# EAGLE board Pcb (EAGLE 9.7.0)
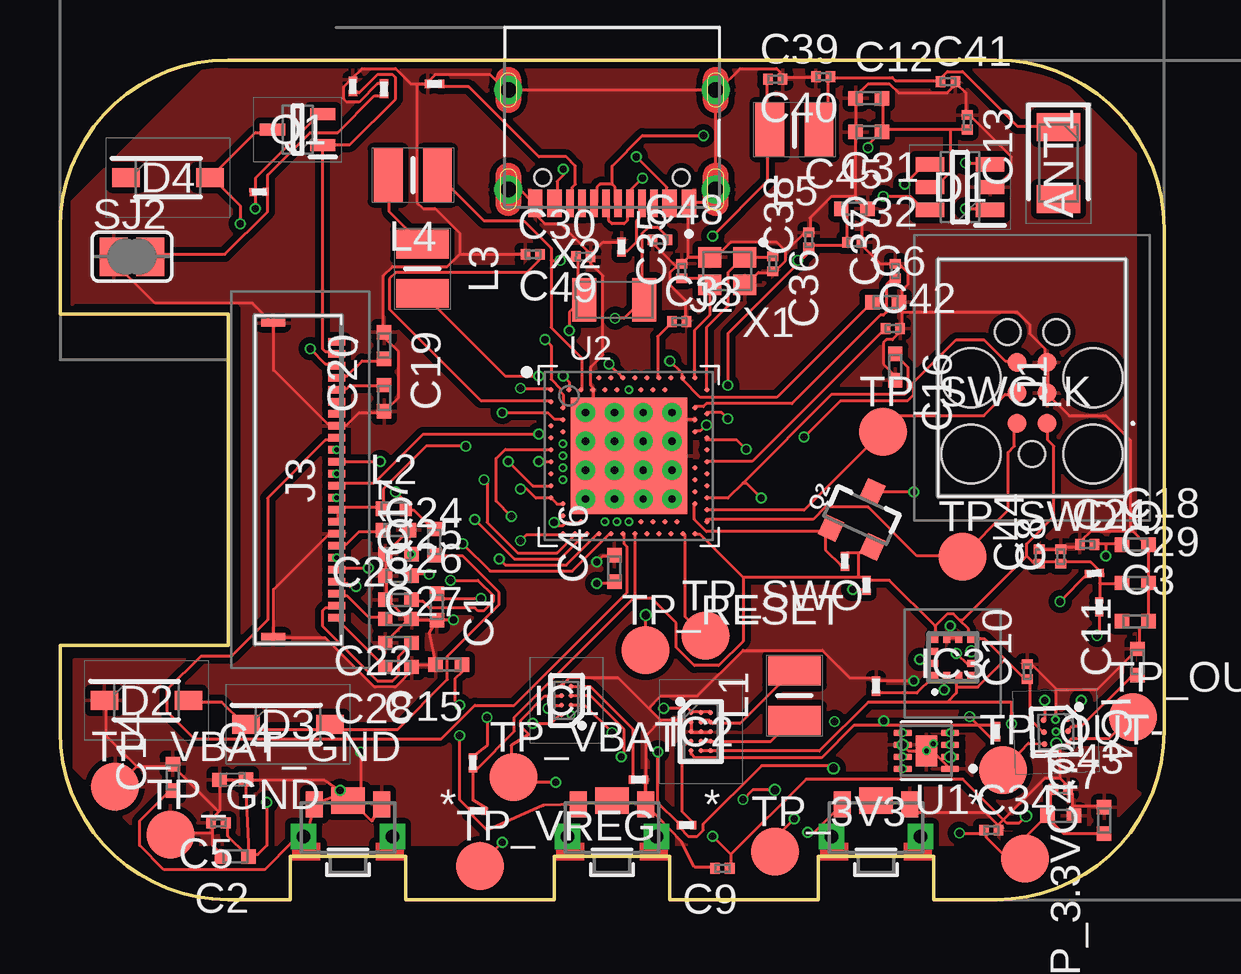
[diagram p0: board, top side]
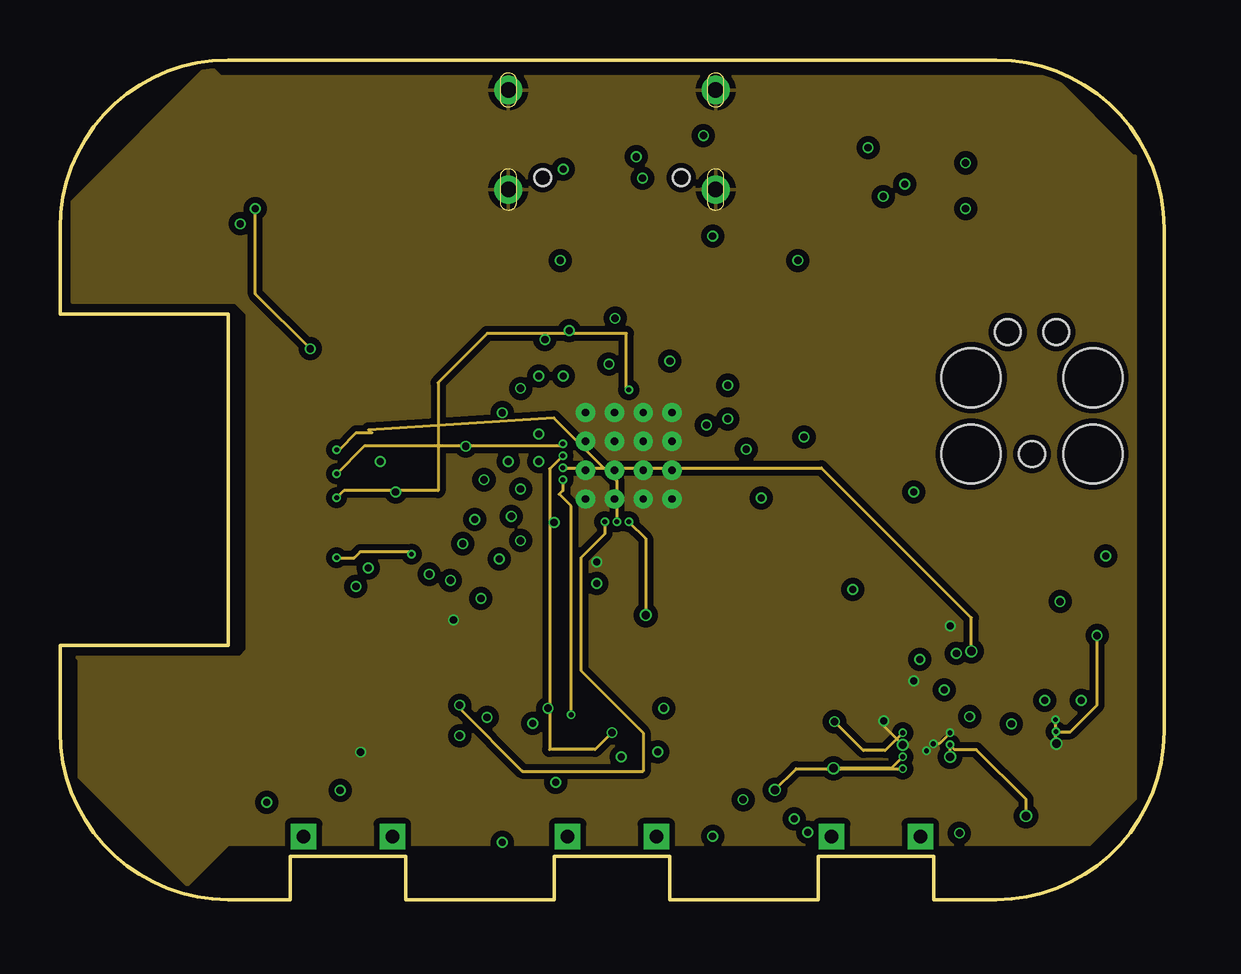
[diagram p1: board, inner layer GND]
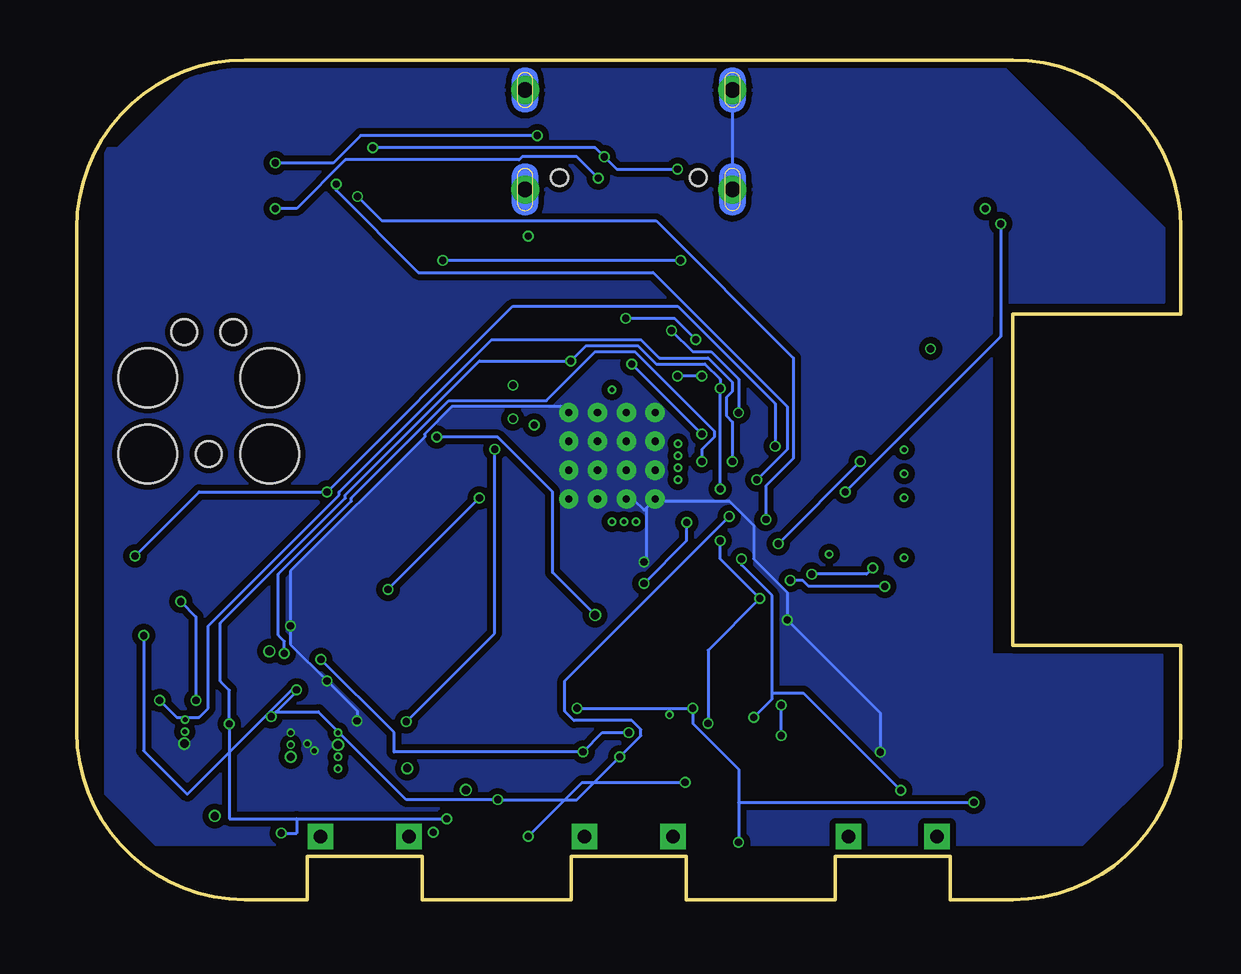
[diagram p2: board, bottom side, seen from below]

Size 46 x 35 mm. Coordinates in mm from the lower left corner, seen from the top.
Outline: 39,0 36.4,0 36.4,1.8 31.6,1.8 31.6,0 25.4,0 25.4,1.8 20.6,1.8 20.6,0 14.4,0 14.4,1.8 9.6,1.8 9.6,0 7,0 arc-90 0,7 0,10.6 7,10.6 7,24.4 0,24.4 0,28 arc-90 7,35 39,35 arc-90 46,28 46,7 arc-90 39,0
Copper layers (1+2*63+16): Top / GND / Bottom / layer 63
Stack-up 4 Layer Stack: Top SilkScreen Epoxy Ink / Top SolderMask User Defined 0.02mm Dk 4.3 / Top Surface Finish Lead-Free 0.02mm / Top User Defined 0.03mm / Dielectric-1 User Defined 0.034mm / Dielectric-2 User Defined 0.034mm / GND User Defined 0.03mm / Dielectric-3 User Defined 0.664mm / Power User Defined 0.03mm / Dielectric-4 User Defined 0.034mm / Dielectric-5 User Defined 0.034mm / Bottom User Defined 0.03mm / Bottom Surface Finish Lead-Free 0.02mm / Bottom SolderMask User Defined 0.02mm Dk 4.3 / Bottom SilkScreen Epoxy Ink
Design rules: minimum copper width 5mil, minimum drill size 0.2mm, copper clearance wire_polygon to wire_polygon 5mil, copper clearance wire_polygon to pad_smd 5mil, copper clearance wire_polygon to via 5mil, copper clearance pad_smd to pad_smd 5mil, copper clearance pad_smd to via 5mil, copper clearance via to via 5mil, copper clearance smd to pad (same net) 5mil, copper clearance smd to via (same net) 5mil, copper clearance smd to smd (same net) 5mil, dimension clearance 0.2mm, via restrict clearance 0mil, restrict clearance 0mil, drill distance 6mil, keepout clearance 0mil

## Footprints (pad centres in the part's own frame; a part is rotated, then mirrored left to right if it is on the bottom)
2450AT18B100E_ANTC3216X140N = smd 1.15 x 1.8: 1 -1.5,0; 2 1.5,0
NORDIC_NRF_3_RESC0402_N = smd 0.6 x 0.6: 1 -0.55,0; 2 0.55,0
NORDIC_NRF_3_RESC0201_N = smd 0.4 x 0.45: 1 -0.305,0; 2 0.305,0
ESP32_C6_LIBRARY_3_SOT95P280X145-6N = smd 1.2 x 0.6: 1 -1.25,0.95; 2 -1.25,0; 3 -1.25,-0.95; 4 1.25,-0.95; 5 1.25,0; 6 1.25,0.95
ESP32_C6_LIBRARY_5_SOD3716X135N = smd 1.15 x 0.8: 1 -1.75,0; 2 1.75,0
BQ25180YBGR_BGA8C40P2X4_100X155X50 = smd 0.2 x 0.2: A1 -0.2,0.6; A2 0.2,0.6; B1 -0.2,0.2; B2 0.2,0.2; C1 -0.2,-0.2; C2 0.2,-0.2; D1 -0.2,-0.6; D2 0.2,-0.6
RT6160AWSC_BGA15C40P3X5_140X230X60 = smd 0.216 x 0.216: A1 -0.4,0.8; A2 0,0.8; A3 0.4,0.8; B1 -0.4,0.4; B2 0,0.4; B3 0.4,0.4; C1 -0.4,0; C2 0,0; C3 0.4,0; D1 -0.4,-0.4; D2 0,-0.4; D3 0.4,-0.4; E1 -0.4,-0.8; E2 0,-0.8; E3 0.4,-0.8
BMA423_BMA423 = smd 0.3 x 0.35: 1 -0.75,-0.775; 2 -0.25,-0.775; 3 0.25,-0.775; 4 0.75,-0.775; 7 0.75,0.775; 8 0.25,0.775; 9 -0.25,0.775; 10 -0.75,0.775 | smd 0.35 x 0.3: 5 0.775,-0.25; 6 0.775,0.25; 11 -0.775,0.25; 12 -0.775,-0.25
DRV2605YZFR_BGA9C50P3X3_144X144X62 = smd 0.25 x 0.25: A1 -0.5,0.5; A2 0,0.5; A3 0.5,0.5; B1 -0.5,0; B2 0,0; B3 0.5,0; C1 -0.5,-0.5; C2 0,-0.5; C3 0.5,-0.5
TC2030-IDC_TC2030IDC = smd 0.783 x 0.783: 1 -0.953,-0.635; 2 -0.953,0.635; 3 0.317,-0.635; 4 0.317,0.635; 5 1.588,-0.635; 6 1.588,0.635 | hole 2.451: -2.223,-2.54; -2.223,2.54; 0.952,-2.54; 0.952,2.54 | hole 1.067: -2.223,0; 2.857,-1.016; 2.857,1.016
KH-TYPE-C-16P_KINGHELM_KH-TYPE-C-16P = smd 0.6 x 1.15: A1_B12 -3.2,4.725; A4_B9 -2.4,4.725; A9_B4 2.4,4.725; A12_B1 3.2,4.725 | smd 0.3 x 1.15: A5 -1.25,4.725; A6 -0.25,4.725; A7 0.25,4.725; A8 1.25,4.725; B5 1.75,4.725; B6 0.75,4.725; B7 -0.75,4.725; B8 -1.75,4.725 | drill 0.65 pad 1.05: SH1 -4.32,0; SH2 4.32,0; SH3 -4.32,4.15; SH4 4.32,4.15 | hole 0.7: -2.89,3.65; 2.89,3.65
503480-2400_5034802400 = smd 0.3 x 0.7: 1 -5.75,1.525; 2 -5.25,1.525; 3 -4.75,1.525; 4 -4.25,1.525; 5 -3.75,1.525; 6 -3.25,1.525; 7 -2.75,1.525; 8 -2.25,1.525; 9 -1.75,1.525; 10 -1.25,1.525; 11 -0.75,1.525; 12 -0.25,1.525; 13 0.25,1.525; 14 0.75,1.525; 15 1.25,1.525; 16 1.75,1.525; 17 2.25,1.525; 18 2.75,1.525; 19 3.25,1.525; 20 3.75,1.525; 21 4.25,1.525; 22 4.75,1.525; 23 5.25,1.525; 24 5.75,1.525 | smd 0.3 x 1: MP1 -6.54,-1.125; MP2 6.54,-1.125
MLP2016SR47MT0S1_INDC2016X100N = smd 1.2 x 2.2: 1 -1.028,0; 2 1.028,0
NORDIC_NRF_2_RESC0402_L = smd 0.5 x 0.6: 1 -0.5,0; 2 0.5,0
ESP32_C6_LIBRARY_6_SOT65P210X110-3N = smd 1.05 x 0.5: 1 -1.05,0.65; 2 -1.05,-0.65; 3 1.05,0
ESP32_C6_LIBRARY_4_ESP32_C6_LIBRARY_4_ESP32_C6_LIBRARY_4_ESP32_C6_LIBRARY_4_ESP32_WROVER_SPARKFUN-DISCRETESEMI_SOT23-3 = smd 0.8 x 0.9: 1 -0.95,-1; 2 0.95,-1; 3 0,1.1
CPF0201D7K68C1_0201 = smd 0.35 x 0.25: 1 0,0.275; 2 0,-0.275
ESP32_C6_LIBRARY_7_JUMPER_SJ = smd 1.168 x 1.6: 1 -0.762,0; 2 0.762,0
2025-10-22_07-23-44_LIBRARY_SW_EVP-AKE31A_PAN = smd 0.711 x 1.092: 1 -1.4,-0.972; 2 1.4,-0.972 | drill 0.559 pad 0.914 square: 3 -1.848,0.381; 4 1.848,0.381 | smd 1.397 x 1.092: 5 0,-1.124
HECTOR_WATCH_1_TP20R = smd 2 x 2: TP 0,0
ESP32_C6_LIBRARY_SON50P200X200X80-9N = smd 0.76 x 0.27: 1 -0.985,0.75; 2 -0.985,0.25; 3 -0.985,-0.25; 4 -0.985,-0.75; 5 0.985,-0.75; 6 0.985,-0.25; 7 0.985,0.25; 8 0.985,0.75 | smd 0.9 x 1.3: 9 0,0
NORDIC_NRF_4_AQFN50P700X700X85_HS-74N = smd 4.85 x 4.85: P$74 0,0 | drill 0.3 pad 0.6: P$75 -1.8,1.8; P$76 -0.6,1.8; P$77 0.6,1.8; P$78 1.8,1.8; P$79 -1.8,0.6; P$80 -0.6,0.6; P$81 0.6,0.6; P$82 1.8,0.6; P$83 -1.8,-0.6; P$84 -0.6,-0.6; P$85 0.6,-0.6; P$86 1.8,-0.6; P$87 -1.8,-1.8; P$88 -0.6,-1.8; P$89 0.6,-1.8; P$90 1.8,-1.8 | smd 0.2 x 0.2: P$A8 -1.25,3.25; P$A10 -0.75,3.25; P$A12 -0.25,3.25; P$A14 0.25,3.25; P$A16 0.75,3.25; P$A18 1.25,3.25; P$A20 1.75,3.25; P$A22 2.25,3.25; P$A23 2.75,3.25; P$AA24 3.25,-2.25; P$AB2 -2.75,-2.5; P$AC5 -2,-2.75; P$AC9 -1,-2.75; P$AC11 -0.5,-2.75; P$AC13 0,-2.75; P$AC15 0.5,-2.75; P$AC17 1,-2.75; P$AC19 1.5,-2.75; P$AC21 2,-2.75; P$AC24 3.25,-2.75; P$AD2 -2.75,-3.25; P$AD4 -2.25,-3.25; P$AD6 -1.75,-3.25; P$AD8 -1.25,-3.25; P$AD10 -0.75,-3.25; P$AD12 -0.25,-3.25; P$AD14 0.25,-3.25; P$AD16 0.75,-3.25; P$AD18 1.25,-3.25; P$AD20 1.75,-3.25; P$AD22 2.25,-3.25; P$AD23 2.75,-3.25; P$B1 -3.25,2.75; P$B3 -2.5,2.75; P$B5 -2,2.75; P$B7 -1.5,2.75; P$B9 -1,2.75; P$B11 -0.5,2.75; P$B13 0,2.75; P$B15 0.5,2.75; P$B17 1,2.75; P$B19 1.5,2.75; P$B24 3.25,2.75; P$C1 -3.25,2.25; P$D2 -2.75,2; P$D23 2.75,2; P$E24 3.25,1.75; P$F2 -2.75,1.5; P$F23 2.75,1.5; P$G1 -3.25,1.25; P$H2 -2.75,1; P$H23 2.75,1; P$J1 -3.25,0.75; P$J24 3.25,0.75; P$K2 -2.75,0.5; P$L1 -3.25,0.25; P$L24 3.25,0.25; P$M2 -2.75,0; P$N1 -3.25,-0.25; P$N24 3.25,-0.25; P$P2 -2.75,-0.5; P$P23 2.75,-0.5; P$R1 -3.25,-0.75; P$R24 3.25,-0.75; P$T2 -2.75,-1; P$T23 2.75,-1; P$U1 -3.25,-1.25; P$U24 3.25,-1.25; P$V23 2.75,-1.5; P$W1 -3.25,-1.75; P$W24 3.25,-1.75; P$Y2 -2.75,-2; P$Y23 2.75,-2
NORDIC_NRF_BT-XTAL_2016_N = smd 0.95 x 0.85: 1 -0.725,-0.575; 2 0.725,-0.575; 3 0.725,0.575; 4 -0.725,0.575
NORDIC_NRF_1_XTAL_3215_N = smd 1 x 1.8: 1 -1.25,0; 2 1.25,0

## Placement (x,y rotation side)
ANT1  2450AT18B100E  [2450AT18B100E_ANTC3216X140N]  41.6,30.7 270 top
C1  1uF  [NORDIC_NRF_3_RESC0402_N]  15.7,12.2 270 top
C2  10uF  [NORDIC_NRF_3_RESC0402_N]  7.3,1.8 180 top
C3  1uF  [NORDIC_NRF_3_RESC0402_N]  44.8,11.6 0 top
C4  10uF  [NORDIC_NRF_3_RESC0402_N]  7.2,5 0.7 top
C5  0.1uF  [NORDIC_NRF_3_RESC0201_N]  6.6,3.2 180 top
C6  22uF  [NORDIC_NRF_3_RESC0402_N]  34.4,24.9 0 top
C7  22uF  [NORDIC_NRF_3_RESC0402_N]  41.7,3.5 0 top
C8  0.1uF  [NORDIC_NRF_3_RESC0201_N]  41.7,14.3 90 top
C9  0.1uF  [NORDIC_NRF_3_RESC0201_N]  27.6,1.3 180 top
C10  0.1uF  [NORDIC_NRF_3_RESC0201_N]  40.3,9.5 90 top
C11  1uF  [NORDIC_NRF_3_RESC0402_N]  44.9,9.9 90 top
C12  4.7uF  [NORDIC_NRF_3_RESC0402_N]  33.7,33.4 0 top
C13  0.1uF  [NORDIC_NRF_3_RESC0201_N]  37.8,32.4 270 top
C14  1uF  [NORDIC_NRF_3_RESC0402_N]  4.7,5.1 90 top
C15  1uF  [NORDIC_NRF_3_RESC0402_N]  16.2,9.8 180 top
C16  1uF  [NORDIC_NRF_3_RESC0402_N]  34.8,22.2 270 top
C17  4.7uF/25V  [NORDIC_NRF_3_RESC0402_N]  15.6,14.9 90 top
C18  10uF  [NORDIC_NRF_3_RESC0402_N]  44.8,14.8 0 top
C19  1uF  [NORDIC_NRF_3_RESC0402_N]  13.5,23.1 270 top
C20  1uF  [NORDIC_NRF_3_RESC0402_N]  13.5,20.9 90 top
C21  0.1uF  [NORDIC_NRF_3_RESC0201_N]  42.8,14.8 0 top
C22  1uF  [NORDIC_NRF_3_RESC0402_N]  14.1,11.7 180 top
C23  1uF  [NORDIC_NRF_3_RESC0402_N]  14,15.4 180 top
C24  1uF  [NORDIC_NRF_3_RESC0402_N]  14.1,14.4 0 top
C25  1uF  [NORDIC_NRF_3_RESC0402_N]  14.1,13.5 0 top
C26  1uF  [NORDIC_NRF_3_RESC0402_N]  14.1,12.5 0 top
C27  1uF  [NORDIC_NRF_3_RESC0402_N]  14.1,10.7 0 top
C28  1uF  [NORDIC_NRF_3_RESC0402_N]  14.1,9.7 180 top
C29  4.7uF  [NORDIC_NRF_3_RESC0402_N]  44.8,13.2 0 top
C30  0.1uF  [NORDIC_NRF_3_RESC0201_N]  19.7,26.9 0 top
C31  1uF  [NORDIC_NRF_3_RESC0402_N]  33.1,28.8 0 top
C32  47nF  [NORDIC_NRF_3_RESC0201_N]  33.1,27.4 0 top
C33  NC  [NORDIC_NRF_3_RESC0201_N]  25.8,24.1 0 top
C34  0.1uF  [NORDIC_NRF_3_RESC0201_N]  38.8,2.9 0 top
C35  12pF  [NORDIC_NRF_3_RESC0201_N]  25.9,26.2 90 top
C36  12pF  [NORDIC_NRF_3_RESC0201_N]  29.7,26.5 270 top
C37  100pF  [NORDIC_NRF_3_RESC0201_N]  34.8,26.2 90 top
C38  NC  [NORDIC_NRF_3_RESC0201_N]  31.2,27.5 90 top
C39  1pF  [NORDIC_NRF_3_RESC0201_N]  29.8,34.2 0 top
C40  1pF  [NORDIC_NRF_3_RESC0201_N]  31.8,34.3 180 top
C41  NC  [NORDIC_NRF_3_RESC0201_N]  37,34.1 0 top
C42  820pF/NC  [NORDIC_NRF_3_RESC0201_N]  34.7,23.8 0 top
C43  0.1uF  [NORDIC_NRF_3_RESC0201_N]  41.7,4.6 0 top
C44  0.1uF  [NORDIC_NRF_3_RESC0201_N]  40.8,14.3 90 top
C45  4.7uF  [NORDIC_NRF_3_RESC0402_N]  33.7,32 180 top
C46  4.7uF  [NORDIC_NRF_3_RESC0402_N]  23.1,13.8 90 top
C47  4.7uF  [NORDIC_NRF_3_RESC0402_N]  43.5,3.3 90 top
C48  12pF  [NORDIC_NRF_3_RESC0201_N]  25,27.5 0 top
C49  12pF  [NORDIC_NRF_3_RESC0201_N]  21.8,26.8 178.2 top
D1  USBLC6-2SC6Y  [ESP32_C6_LIBRARY_3_SOT95P280X145-6N]  37.5,29.7 180 top
D2  MBR0530  [ESP32_C6_LIBRARY_5_SOD3716X135N]  3.6,8.3 0 top
D3  MBR0530  [ESP32_C6_LIBRARY_5_SOD3716X135N]  9.5,7.3 0 top
D4  MBR0530  [ESP32_C6_LIBRARY_5_SOD3716X135N]  4.5,30.1 0 top
IC1  BQ25180YBGR  [BQ25180YBGR_BGA8C40P2X4_100X155X50]  21.1,8.3 180 top
IC2  RT6160AWSC  [RT6160AWSC_BGA15C40P3X5_140X230X60]  26.7,7 0 top
IC3  BMA423  [BMA423_BMA423]  37.2,10.1 0 top
IC4  DRV2605YZFR  [DRV2605YZFR_BGA9C50P3X3_144X144X62]  41.5,7 272.1 top
J1  TC2030-IDC  [TC2030-IDC_TC2030IDC]  40.5,20.8 90 top
J2  KH-TYPE-C-16P_KH-TYPE-C-16P  [KH-TYPE-C-16P_KINGHELM_KH-TYPE-C-16P]  23,33.75 180 top
J3  503480-2400  [503480-2400_5034802400]  10,17.5 270 top
L1  FTC252012SR47MBCA  [MLP2016SR47MT0S1_INDC2016X100N]  30.6,8.5 270 top
L2  68uH  [NORDIC_NRF_2_RESC0402_L]  13.9,16.3 0 top
L3  10uH  [MLP2016SR47MT0S1_INDC2016X100N]  15.1,26.3 90 top
L4  15uH  [MLP2016SR47MT0S1_INDC2016X100N]  14.7,30.2 0 top
L5  3.9nH  [MLP2016SR47MT0S1_INDC2016X100N]  30.6,32.1 0 top
Q1  SI1308EDL-T1-GE3  [ESP32_C6_LIBRARY_6_SOT65P210X110-3N]  9.9,32.1 180 top
Q2  20V/4.2A/52mΩ/1.4W  [ESP32_C6_LIBRARY_4_ESP32_C6_LIBRARY_4_ESP32_C6_LIBRARY_4_ESP32_C6_LIBRARY_4_ESP32_WROVER_SPARKFUN-DISCRETESEMI_SOT23-3]  33.4,16 335.6 top
R1  10k  [CPF0201D7K68C1_0201]  24.1,5 270 top
R2  0  [CPF0201D7K68C1_0201]  26.1,3.1 270 top
R3  0  [CPF0201D7K68C1_0201]  39,7 0 top
R4  3k3  [CPF0201D7K68C1_0201]  43.1,13.6 274.4 top
R5  3k3  [CPF0201D7K68C1_0201]  43.3,12.2 0 top
R6  0  [CPF0201D7K68C1_0201]  34,8.9 180 top
R7  5k1  [CPF0201D7K68C1_0201]  23.4,27.2 0 top
R8  5k1  [CPF0201D7K68C1_0201]  15.6,34 270 top
R9  10k  [CPF0201D7K68C1_0201]  17.2,5.7 0 top
R10  10k  [CPF0201D7K68C1_0201]  17.4,3.7 90 top
R11  10k  [CPF0201D7K68C1_0201]  33.6,13.1 180 top
R12  10k  [CPF0201D7K68C1_0201]  12.2,33.9 0 top
R13  0.47  [CPF0201D7K68C1_0201]  8.3,29.5 272.5 top
R14  2.2  [CPF0201D7K68C1_0201]  13.5,33.8 0 top
R15  10k  [CPF0201D7K68C1_0201]  32.7,14.1 180 top
SJ2  0  [ESP32_C6_LIBRARY_7_JUMPER_SJ]  3,26.8 0 top
SW_DN  2025-10-22_07-23-44_LIBRARY_EVP-AKE31ASW_EVP-AKE31A_PAN  [2025-10-22_07-23-44_LIBRARY_SW_EVP-AKE31A_PAN]  34,3 180 top
SW_ENT  2025-10-22_07-23-44_LIBRARY_EVP-AKE31ASW_EVP-AKE31A_PAN  [2025-10-22_07-23-44_LIBRARY_SW_EVP-AKE31A_PAN]  23,3 180 top
SW_UP  2025-10-22_07-23-44_LIBRARY_EVP-AKE31ASW_EVP-AKE31A_PAN  [2025-10-22_07-23-44_LIBRARY_SW_EVP-AKE31A_PAN]  12,3 180 top
TP_3.3V  HECTOR_WATCH_1_TPTP20R  [HECTOR_WATCH_1_TP20R]  40.2,1.7 270 top
TP_3V3  HECTOR_WATCH_1_TPTP20R  [HECTOR_WATCH_1_TP20R]  29.8,2 0 top
TP_GND  HECTOR_WATCH_1_TPTP20R  [HECTOR_WATCH_1_TP20R]  4.6,2.7 0 top
TP_OUT+  HECTOR_WATCH_1_TPTP20R  [HECTOR_WATCH_1_TP20R]  44.7,7.6 0 top
TP_OUT-  HECTOR_WATCH_1_TPTP20R  [HECTOR_WATCH_1_TP20R]  39.3,5.4 0 top
TP_RESET  HECTOR_WATCH_1_TPTP20R  [HECTOR_WATCH_1_TP20R]  24.4,10.4 0 top
TP_SWCLK  HECTOR_WATCH_1_TPTP20R  [HECTOR_WATCH_1_TP20R]  34.3,19.5 0 top
TP_SWDIO  HECTOR_WATCH_1_TPTP20R  [HECTOR_WATCH_1_TP20R]  37.6,14.3 0 top
TP_SWO  HECTOR_WATCH_1_TPTP20R  [HECTOR_WATCH_1_TP20R]  26.9,11 0 top
TP_VBAT  HECTOR_WATCH_1_TPTP20R  [HECTOR_WATCH_1_TP20R]  18.9,5.1 0 top
TP_VBAT_GND  HECTOR_WATCH_1_TPTP20R  [HECTOR_WATCH_1_TP20R]  2.3,4.7 0 top
TP_VREG  HECTOR_WATCH_1_TPTP20R  [HECTOR_WATCH_1_TP20R]  17.5,1.4 0 top
U1  MAX17048G+T10  [ESP32_C6_LIBRARY_SON50P200X200X80-9N]  36.1,6.2 180 top
U2  NRF52840_QF  [NORDIC_NRF_4_AQFN50P700X700X85_HS-74N]  23.7,18.5 0 top
X1  32Mhz  [NORDIC_NRF_BT-XTAL_2016_N]  27.8,26.2 180 top
X2  32.768kHz  [NORDIC_NRF_1_XTAL_3215_N]  23.1,25 0.1 top

## Library data of the parts
ANT1 = InkTime_v5; ARROW_PART_NUMBER: 2450AT18B100E; ARROW_PRICE-STOCK: https://www.arrow.com/en/products/2450at18b100e/johanson-dielectrics?utm_currency=USD&region=nac; DESCRIPTION: Antennas 2.45GHz ANTENNA; HEIGHT: 1.4mm; MANUFACTURER_NAME: JOHANSON TECHNOLOGY; MANUFACTURER_PART_NUMBER: 2450AT18B100E; MOUSER_PART_NUMBER: 609-2450AT18B100E; MOUSER_PRICE-STOCK: https://www.mouser.co.uk/ProductDetail/Johanson-Technology/2450AT18B100E?qs=yCnrNFeXz%252Bh5MFsFIXGZGA%3D%3D
C1-C49 L2 R1-R15 SJ2 TP_3.3V TP_3V3 TP_GND TP_OUT+ TP_OUT- TP_RESET TP_SWCLK TP_SWDIO TP_SWO TP_VBAT TP_VBAT_GND TP_VREG U2 X1 X2 = InkTime_v5
D1 = InkTime_v5; AVAILABILITY: In Stock; CHECK_PRICES: https://www.snapeda.com/parts/USBLC6-2SC6Y/STMicroelectronics/view-part/?ref=eda; DESCRIPTION: 17V Clamp 5A (8/20µs) Ipp Tvs Diode Surface Mount SOT-23-6; MF: STMicroelectronics; MP: USBLC6-2SC6Y; PACKAGE: SOT-23-6 STMicroelectronics; PRICE: None; SNAPEDA_LINK: https://www.snapeda.com/parts/USBLC6-2SC6Y/STMicroelectronics/view-part/?ref=snap
D2-D4 = InkTime_v5; AVAILABILITY: In Stock; CHECK_PRICES: https://www.snapeda.com/parts/MBR0530/Onsemi/view-part/?ref=eda; DESCRIPTION: Diode Schottky 30 V 500mA Surface Mount SOD-123; MF: ON Semiconductor; MP: MBR0530; PACKAGE: SOD-123-2 ON Semiconductor; PRICE: None; PURCHASE-URL: https://www.snapeda.com/api/url_track_click_mouser/?unipart_id=179458&manufacturer=ON Semiconductor&part_name=MBR0530&search_term=None; SNAPEDA_LINK: https://www.snapeda.com/parts/MBR0530/Onsemi/view-part/?ref=snap
IC1 = InkTime_v5; ARROW_PART_NUMBER: BQ25180YBGR; ARROW_PRICE-STOCK: https://www.arrow.com/en/products/bq25180ybgr/texas-instruments?utm_currency=USD&region=nac; DESCRIPTION: Charger IC Lithium Ion/Polymer, Lithium Iron Phosphate 8-DSBGA (1.6x1.1); HEIGHT: 0.5mm; MANUFACTURER_NAME: Texas Instruments; MANUFACTURER_PART_NUMBER: BQ25180YBGR; MOUSER_PART_NUMBER: 595-BQ25180YBGR; MOUSER_PRICE-STOCK: https://www.mouser.co.uk/ProductDetail/Texas-Instruments/BQ25180YBGR?qs=doiCPypUmgEWjAK%252BJAX6Tw%3D%3D
IC2 = InkTime_v5; DESCRIPTION: Buck-Boost Regulator Positive Output Step-Up/Step-Down I2C DC-DC Controller IC 15-WL-CSP (BSC) (1.4x2.3); HEIGHT: 0.6mm; MANUFACTURER_NAME: RICHTEK; MANUFACTURER_PART_NUMBER: RT6160AWSC; MOUSER_PART_NUMBER: 835-RT6160AWSC; MOUSER_PRICE-STOCK: https://www.mouser.co.uk/ProductDetail/Richtek/RT6160AWSC?qs=amGC7iS6iy%2FLd9PSoixZXQ%3D%3D
IC3 = InkTime_v5; ARROW_PART_NUMBER: BMA423; ARROW_PRICE-STOCK: https://www.arrow.com/en/products/bma423/bosch; DESCRIPTION: Accelerometers Triaxial low-g 12bit Acceleration Sensor; HEIGHT: 1mm; MANUFACTURER_NAME: BOSCH; MANUFACTURER_PART_NUMBER: BMA423; MOUSER_PART_NUMBER: 262-BMA423; MOUSER_PRICE-STOCK: https://www.mouser.co.uk/ProductDetail/Bosch-Sensortec/BMA423?qs=HXFqYaX1Q2xC%252BSgeGoX3mg%3D%3D
IC4 = InkTime_v5; ARROW_PART_NUMBER: DRV2605YZFR; ARROW_PRICE-STOCK: https://www.arrow.com/en/products/drv2605yzfr/texas-instruments?region=nac; DESCRIPTION: Haptic Driver for ERM/LRA with Built-In Library and Smart Loop Architecture; HEIGHT: 0.625mm; MANUFACTURER_NAME: Texas Instruments; MANUFACTURER_PART_NUMBER: DRV2605YZFR
J1 = InkTime_v5; DESCRIPTION: CABLE ADAPTER 6 POS; HEIGHT: 19mm; MANUFACTURER_NAME: Tag Connect; MANUFACTURER_PART_NUMBER: TC2030-IDC
J2 = InkTime_v5; AVAILABILITY: Not in stock; CHECK_PRICES: https://www.snapeda.com/parts/KH-TYPE-C-16P/Kinghelm/view-part/?ref=eda; MF: kinghelm; MP: KH-TYPE-C-16P; PACKAGE: None; PRICE: None; SNAPEDA_LINK: https://www.snapeda.com/parts/KH-TYPE-C-16P/Kinghelm/view-part/?ref=snap
J3 = InkTime_v5; DESCRIPTION: FFC & FPC Connectors 0.5mm FPC RA SMT Dual Contact 24Ckt; HEIGHT: 1.87mm; MANUFACTURER_NAME: Molex; MANUFACTURER_PART_NUMBER: 503480-2400; MOUSER_PART_NUMBER: 538-503480-2400; MOUSER_PRICE-STOCK: https://www.mouser.co.uk/ProductDetail/Molex/503480-2400?qs=OAhjpuo3Vu7efIoxFh9AOw%3D%3D
L1 L3-L5 = InkTime_v5; DESCRIPTION: SMD / SMT Inductors (Coils), L=0.47?H, L x W x T :; HEIGHT: 1mm; JLCPCB: https://jlcpcb.com/partdetail/6763488-FTC252012SR47MBCA/C5832368; MANUFACTURER_NAME: TDK; MANUFACTURER_PART_NUMBER: FTC252012SR47MBCA
Q1 = InkTime_v5; AVAILABILITY: In Stock; CHECK_PRICES: https://www.snapeda.com/parts/SI1308EDL-T1-GE3/Vishay+Siliconix/view-part/?ref=eda; DESCRIPTION: Si1308EDL-T1-GE3 N-channel MOSFET Transistor, 1.5 A, 30 V, 3-Pin SC-70 | Siliconix / Vishay SI1308EDL-T1-GE3; MF: Vishay Siliconix; MP: SI1308EDL-T1-GE3; PACKAGE: SOT-323 Vishay Semiconductor; PRICE: None; PURCHASE-URL: https://www.snapeda.com/api/url_track_click_mouser/?unipart_id=274603&manufacturer=Vishay Siliconix&part_name=SI1308EDL-T1-GE3&search_term=None; SNAPEDA_LINK: https://www.snapeda.com/parts/SI1308EDL-T1-GE3/Vishay+Siliconix/view-part/?ref=snap
Q2 = InkTime_v5; PROD_ID: TRAN-14388
SW_DN SW_ENT SW_UP = InkTime_v5; COPYRIGHT: Copyright (C) 2025 Ultra Librarian. All rights reserved.; DIGI-KEY_PART_NUMBER_1: P123437TR-ND; DIGI-KEY_PART_NUMBER_2: P123437CT-ND; DIGI-KEY_PART_NUMBER_3: P123437DKR-ND; MANUFACTURER_NAME: Panasonic; MANUFACTURER_PART_NUMBER: EVP-AKE31A
U1 = InkTime_v5; AVAILABILITY: In Stock; CHECK_PRICES: https://www.snapeda.com/parts/MAX17048G+T10/Analog+Devices/view-part/?ref=eda; DESCRIPTION: 3µA 1-Cell/2-Cell Fuel Gauge with ModelGauge; MF: Analog Devices; MP: MAX17048G+T10; PACKAGE: TDFN-8 Maxim; PRICE: None; PURCHASE-URL: https://www.snapeda.com/api/url_track_click_mouser/?unipart_id=329239&manufacturer=Analog Devices&part_name=MAX17048G+T10&search_term=None; SNAPEDA_LINK: https://www.snapeda.com/parts/MAX17048G+T10/Analog+Devices/view-part/?ref=snap

## Nets
3V3: C6.1 C7.1 C8.1 C10.1 C29.1 C34.1 C43.1 C44.1 C47.1 IC2.E2 IC2.E3 IC3.3 IC3.7 IC3.10 IC4.C2 J1.1 Q2.2 R4.1 R5.1 R9.2 R10.2 R11.2 R15.2 TP_3.3V.TP TP_3V3.TP U2.P$A22 U2.P$AD14 U2.P$AD23 U2.P$B1 U2.P$W1 U2.P$Y2
ALERT: U1.5 U2.P$J24
D+: D1.6 U2.P$AD6
D-: D1.4 U2.P$AD4
DN: D1.1 J2.A7 J2.B7
DP: D1.3 J2.A6 J2.B6
EPD_3V3: C18.1 C21.2 J3.15 J3.16 L2.1 Q2.3
EPD_BUSY: J3.9 U2.P$AD12
EPD_CS: J3.12 U2.P$K2
EPD_DC: J3.11 U2.P$AD10
EPD_RST: J3.10 U2.P$AC11
GDR: J3.2 Q1.1 R12.2
GND: C1.2 C2.2 C3.2 C4.1 C5.2 C6.2 C7.2 C8.2 C9.2 C10.2 C11.2 C12.1 C13.1 C14.2 C15.2 C16.2 C18.2 C19.1 C20.1 C21.1 C22.1 C23.1 C24.1 C25.1 C26.1 C27.1 C28.1 C29.2 C30.1 C31.2 C32.2 C33.2 C34.2 C35.2 C36.2 C37.2 C38.2 C39.2 C40.2 C41.2 C42.2 C43.2 C44.2 C45.2 C46.2 C47.2 C48.1 C49.1 D1.2 D2.1 IC1.D2 IC2.B1 IC2.C1 IC2.C2 IC2.C3 IC3.8 IC3.9 IC4.B1 IC4.B3 J1.3 J1.5 J2.A1_B12 J2.A12_B1 J2.SH1 J2.SH2 J2.SH3 J2.SH4 J3.8 J3.17 J3.MP1 J3.MP2 R1.1 R6.2 R7.1 R8.2 R12.1 R14.1 SJ2.1 SW_DN.1 SW_ENT.1 SW_UP.1 TP_GND.TP TP_VBAT_GND.TP U1.1 U1.4 U1.6 U1.9 U2.P$74 U2.P$75 U2.P$76 U2.P$77 U2.P$78 U2.P$79 U2.P$80 U2.P$81 U2.P$82 U2.P$83 U2.P$84 U2.P$85 U2.P$86 U2.P$87 U2.P$88 U2.P$89 U2.P$90 U2.P$B7 U2.P$F23 X1.2 X1.4
HAPTIC_EN: IC4.A1 U2.P$U1
IMU_INT1: IC3.5 U2.P$N1
IMU_INT2: IC3.6 U2.P$P2
LX1: IC2.B2 IC2.B3 L1.1
LX2: IC2.D2 IC2.D3 L1.2
MOSI: J3.14 U2.P$B13
N$1: IC1.D1 R1.2
N$5: IC2.D1 R2.1
N$8: IC2.E1 R3.1
N$20: IC3.1 R6.1
N$27: C11.1 IC4.A2
N$31: J2.A5 R7.2
N$37: C17.1 D2.2 D3.1
N$38: J2.B5 R8.1
N$40: C17.2 D4.2 L2.2 Q1.3
N$48: R13.1 R14.2 SJ2.2
N$50: C19.2 J3.4
N$51: C20.2 J3.5
N$54: C23.2 J3.18
N$55: C24.2 J3.19
N$56: C25.2 J3.20
N$57: C26.2 J3.21
N$58: C22.2 J3.22
N$59: C27.2 J3.23
N$60: C28.2 J3.24
N$63: C30.2 U2.P$C1
N$64: L3.1 U2.P$B3
N$65: L3.2 L4.1
N$66: C31.1 C32.1 C38.1 L4.2 U2.P$B5 U2.P$E24
N$71: C33.1 U2.P$A18
N$73: C36.1 U2.P$B24 X1.1
N$74: C35.1 U2.P$A23 X1.3
N$75: C37.1 U2.P$D23
N$77: C39.1 L5.1 U2.P$H23
N$78: ANT1.1 C40.1 C41.1 L5.2
N$80: C42.1 U2.P$N24
N$94: C46.1 U2.P$AC5
N$103: C48.2 U2.P$D2 X2.2
N$104: C49.2 U2.P$F2 X2.1
OUT+: IC4.A3 TP_OUT+.TP
OUT-: IC4.C3 TP_OUT-.TP
P0.13: C14.1 R9.1 SW_UP.2 U2.P$AD8
P0.14: C15.1 R10.1 SW_ENT.2 U2.P$AC9
P1.01: Q2.1 R15.1 U2.P$Y23
P1.02: C16.1 R11.1 SW_DN.2 U2.P$W24
PMIC_INT: IC1.A1 U2.P$T2
PREVGH: D4.1
PREVGL: D3.2
RESE: J3.3 Q1.2 R13.2
RESET: J1.6 TP_RESET.TP U2.P$AC13
SCK: J3.13 U2.P$A12
SCL: IC1.B1 IC3.12 IC4.C1 R2.2 R4.2 U1.7 U2.P$M2
SDA: IC1.C1 IC3.2 IC4.B2 R3.2 R5.2 U1.8 U2.P$L1
SWCLK: J1.4 TP_SWCLK.TP U2.P$AA24
SWDIO: J1.2 TP_SWDIO.TP U2.P$AC24
SWO: TP_SWO.TP U2.P$AD22
VBAT: C9.1 IC1.C2 TP_VBAT.TP U1.2 U1.3
VBUS: C1.1 C12.2 C13.2 C45.1 D1.5 IC1.A2 J2.A4_B9 J2.A9_B4 U2.P$AD2
VREG: C2.1 C4.2 C5.1 IC1.B2 IC2.A1 IC2.A2 IC2.A3 TP_VREG.TP
VREG1: C3.1

## Tracks (layer width: path | path; a pad name or v marks a point on that pad's centre or on a via)
3V3  (via drill 0.3)
  Top 0.127: 20.46,16.74 20.71,16.48 20.97,16.48 U2.P$Y2 | v19.19,21.31 20.46,21.31 U2.P$B1 | v19.19,17.12 19.44,17.12 19.82,16.74 20.46,16.74 | 20.46,16.74 U2.P$W1 | C6.1 33.8,24.87 29.86,20.93 26.68,20.93 25.92,21.69 U2.P$A22 25.92,21.82 25.92,21.95 v25.41,22.45 | C43.1 41.29,4.55 41.29,3.66 41.16,3.53 C7.1 | C47.1 43.45,2.77 41.8,2.77 41.16,3.4 C7.1 | 39.76,2.13 40.14,1.75 TP_3.3V.TP 39.76,2.13 | 39.76,2.13 39.41,1.78 38.59,2.6 38.59,2.83 C34.1 38.36,2.77 v37.48,2.77 | 39.76,2.13 41.03,3.4 C7.1 | v30.59,3.37 29.8,2.58 TP_3V3.TP | 23.89,12.55 18.94,7.59 18.94,7.02 17.38,5.46 R9.2 17.2,4.15 17.79,3.78 R10.2 | 43.32,13.18 43.32,13.56 R4.1 43.32,13.69 42.94,14.07 41.8,14.07 C8.1 41.67,14.07 40.91,14.07 C44.1 40.78,14.07 40.53,14.07 40.27,14.32 | 43.32,13.18 43.32,12.55 R5.1 | 43.32,13.18 44.21,13.18 C29.1 | 40.27,14.32 40.27,14.83 41.41,15.98 41.41,18.9 41.16,19.15 41.16,19.79 J1.1 | 33.29,14.45 33.67,14.45 33.8,14.58 Q2.2 | 33.29,14.45 32.78,14.45 R15.2 | 28.46,13.44 26.68,15.21 26.43,15.21 U2.P$AD23 | 33.29,13.44 33.54,13.44 R11.2 33.67,13.31 34.56,13.31 36.46,11.4 | 33.29,13.44 28.46,13.44 | 33.29,13.44 33.29,14.45 | 36.46,11.4 36.46,10.9 IC3.10 | 36.46,11.4 36.97,11.91 37.22,11.91 37.48,11.66 | 37.48,11.66 37.86,11.28 37.86,10.9 IC3.7 38.52,10.87 39.38,10.01 | IC4.C2 40.94,6.98 40.4,7.52 40.4,9.12 C10.1 40.27,9.12 39.38,10.01 | IC2.E2 26.68,6.2 27.06,6.2 IC2.E3 27.19,6.2 31.64,6.2 33.67,8.23 36.97,8.23 | 36.97,8.23 39.64,8.23 v39.64,7.32 | 36.97,8.23 37.35,8.61 37.35,8.86 | 37.35,8.86 37.35,9.24 IC3.3 | 39.38,10.01 38.24,8.86 37.35,8.86 | 40.27,14.32 37.61,11.66 37.48,11.66 | 23.89,12.55 24.65,12.55 25.67,11.53 25.67,10.52 26.43,9.75 27.45,9.75 28.46,10.77 28.46,13.44
  Top 0.127: U2.P$AD14 23.95,12.61 23.89,12.55
  Bottom 0.127: v19.19,17.12 v19.19,21.31 19.19,21.69 19.82,22.33 21.86,22.33 22.62,23.09 24.78,23.09 v25.41,22.45 29.22,22.45 34.81,16.86 34.81,16.74 40.02,11.53 40.02,9.1 39.64,8.72 v39.64,7.32 39.64,3.37 36.84,3.37 | v37.48,2.77 36.84,2.77 36.84,3.37 | 36.84,3.37 v30.59,3.37
ALERT  (via drill 0.2 pad 0.16, 0.3)
  Top 0.127: v28.59,18.77 28.21,19.15 26.94,19.15 U2.P$J24
  GND 0.127: U1.5 34.38,6.22 33.47,6.22 v32.27,7.42
  Bottom 0.127: v28.59,18.77 28.59,11.1 v32.27,7.42
  other vias: 35.12,6.95
D+  (via drill 0.3)
  Top 0.127: v17.29,15.85 18.94,14.2 20.84,14.2 21.86,15.21 U2.P$AD6 | v34.3,29.31 35.45,29.31 35.95,28.8 36.21,28.8 D1.6
  Bottom 0.127: v17.29,15.85 17.29,17.25 16.14,18.39 16.14,22.58 21.86,28.3 33.29,28.3 v34.3,29.31
D-  (via drill 0.3)
  Top 0.127: v17.67,17.5 17.79,17.37 17.79,15.72 19.06,14.45 20.71,14.45 21.48,15.21 U2.P$AD4 | v35.19,29.82 35.95,30.58 36.21,30.58 D1.4
  Bottom 0.127: v17.67,17.5 16.4,18.77 16.4,20.55 21.98,26.14 31.76,26.14 35.19,29.56 v35.19,29.82
DN  (via drill 0.3)
  Top 0.127: J2.A7 22.87,28.93 22.87,28.3 23,28.17 23.51,28.17 23.64,28.3 23.64,28.93 J2.B7 23.76,29.06 23.76,29.56 v24.27,30.07 | v37.73,28.8 38.75,28.8 D1.1
  Bottom 0.127: v37.73,28.8 36.84,28.8 34.81,30.84 27.57,30.84 27.45,30.96 25.16,30.96 v24.27,30.07
DP  (via drill 0.3)
  Top 0.127: 23,29.82 22.49,29.82 22.36,29.69 22.36,29.06 J2.B6 | 23,29.82 23.13,29.69 23.13,29.06 J2.A6 | v37.73,30.71 38.75,30.71 D1.3 | v26.81,31.85 24.27,31.85 23,30.58 23,29.82
  Bottom 0.127: v37.73,30.71 35.32,30.71 34.18,31.85 v26.81,31.85
EPD_3V3  (via drill 0.3)
  Top 0.127: J3.16 11.57,15.85 11.57,16.23 J3.15 11.57,16.36 13.35,16.36 L2.1 13.47,16.36 13.47,17.12 15.25,18.9 v16.9,18.9 | 43.57,14.83 44.21,14.83 C18.1 | 43.57,14.83 43.19,14.83 C21.2 | v35.57,16.99 33.92,16.99 Q2.3 | 43.57,14.83 v43.57,14.32
  Bottom 0.127: v43.57,14.32 40.91,16.99 v35.57,16.99 27.83,24.74 20.97,24.74 16.9,20.68 v16.9,18.9
EPD_BUSY
  Top 0.127: U2.P$AD12 23.51,15.21 23.51,14.83 23.64,14.71 23.64,12.8 18.94,8.1 17.29,8.1 15.89,6.71 5.6,6.71 4.46,7.85 4.46,8.74 5.86,10.13 7.12,10.13 8.65,11.66 8.65,16.74 11.06,19.15 11.44,19.15 J3.9
EPD_CS  (via drill 0.2 pad 0.16)
  GND 0.127: J3.12 12.68,18.9 20.85,18.9 U2.P$K2
  other vias: 11.53,17.75 20.95,19
EPD_DC  (via drill 0.3)
  Top 0.127: v16.78,14.83 17.92,13.69 21.35,13.69 22.87,15.21 U2.P$AD10 | v13.35,18.26 11.57,18.26 J3.11
  Bottom 0.127: v13.35,18.26 v16.78,14.83
EPD_RST  (via drill 0.2 pad 0.16)
  GND 0.127: U2.P$AC11 23.2,17.45 20.58,20.07 12.86,19.58 12.99,19.45 12.32,19.45 11.62,18.75 J3.10
  other vias: 23.2,15.75 11.53,18.75
GDR
  Top 0.127: R12.2 12.46,33.63 13.22,34.39 13.86,34.39 13.98,34.26 13.98,33.38 12.08,31.47 11.06,31.47 Q1.1 10.94,31.34 10.94,22.96 11.06,22.83 11.44,22.83 J3.2
GND  (via drill 0.2 pad 0.16, 0.3, 0.35, 0.35 pad 0.16)
  Top 0.127: C40.2 31.38,34.26 30.11,34.26 C39.2 29.98,34.26 29.98,34.52 29.86,34.64 28.33,34.64 27.45,33.76 J2.SH1 | 25.67,26.39 25.79,26.52 C35.2 25.92,26.52 26.18,26.77 | 25.67,26.39 25.41,26.14 25.41,25.63 26.05,24.99 26.05,24.1 C33.2 | 25.67,26.39 24.78,27.28 24.78,27.41 C48.1 | 26.18,26.77 27.06,26.77 X1.2 27.19,26.9 27.45,26.9 27.95,27.41 29.86,27.41 30.24,27.02 | 26.18,26.77 26.18,28.93 J2.A1_B12 26.3,29.06 26.81,29.06 27.32,29.56 J2.SH3 27.32,29.69 27.32,33.63 J2.SH1 | 41.54,8.74 40.4,9.88 C10.2 | IC4.B1 41.48,8.72 41.48,8.74 41.54,8.74 | C44.2 40.91,14.58 41.67,14.58 C8.2 41.8,14.71 42.43,14.71 C21.1 42.56,14.83 42.56,14.96 42.94,15.34 44.59,15.34 | 44.59,15.34 44.72,15.34 45.23,14.83 C18.2 45.35,14.71 45.35,13.31 C29.2 45.35,13.18 45.35,11.66 C3.2 45.23,11.53 44.97,11.28 44.97,10.52 C11.2 44.84,10.39 43.19,8.74 41.54,8.74 | 35.06,24.48 35.06,24.87 C6.2 35.06,24.99 35.06,25.37 35.32,25.63 35.32,26.14 35.06,26.39 34.81,26.39 C37.2 34.68,26.52 34.18,26.52 33.41,27.28 C32.2 33.41,27.41 33.41,28.55 33.54,28.68 C31.2 33.54,28.8 33.16,29.18 33.16,29.31 | 35.06,24.48 35.06,23.85 C42.2 35.06,23.72 34.68,23.34 34.43,23.34 34.3,23.21 34.3,22.33 34.68,21.95 34.68,21.69 C16.2 | 35.06,24.48 39.89,24.48 40.4,23.98 40.4,23.6 41.03,22.96 41.03,22.45 J1.5 41.16,22.33 41.16,21.18 J1.3 41.16,21.06 42.05,20.17 43.57,20.17 44.59,19.15 44.59,15.34 | D1.2 38.88,29.82 39.13,29.82 39.64,30.33 39.64,30.96 37.99,32.61 37.86,32.61 C13.1 37.73,32.74 37.73,33.63 37.35,34.01 C41.2 37.22,34.01 37.22,33.88 36.97,33.63 34.94,33.63 34.56,34.01 33.67,34.01 33.16,33.5 C12.1 33.16,33.38 33.16,32.11 C45.2 33.16,31.98 33.16,29.31
  Top 0.127: X1.4 28.59,25.63 29.1,26.14 29.6,26.14 C36.2 29.73,26.14 30.24,26.64 30.24,27.02 | 30.24,27.02 31,27.79 31.13,27.79 C38.2 31.26,27.91 31.26,28.42 32.14,29.31 33.16,29.31 | C9.2 27.19,1.37 26.43,1.37 25.9,2.43 SW_ENT.1 24.4,4.04 24.4,4.94 R1.1 24.4,5.06 24.4,6.83 25.03,7.47 | 25.03,7.47 24.52,7.97 | 24.52,7.97 23.25,9.24 21.22,9.24 20.97,8.99 20.97,8.86 IC1.D2 | 25.03,7.47 26.3,7.47 IC2.B1 26.3,7.34 26.3,7.09 IC2.C1 26.3,6.96 26.68,6.96 | 26.68,6.96 27.06,6.96 IC2.C3 | 26.68,6.96 IC2.C2 | 24.52,7.97 25.03,8.48 26.56,8.48 28.46,10.39 31.76,10.39 32.91,9.24 33.92,9.24 R6.2 34.05,9.12 v35.57,9.12 | U1.6 35.16,6.39 35.34,6.2 U1.9 | U1.9 v36.39,6.49 | 35.4,4.27 SW_DN.1 35.76,3.61 38.58,3.61 39.11,3.08 C34.2 39.3,2.99 39.13,3.15 41.03,5.05 41.67,5.05 | 41.67,5.05 41.67,6.43 IC4.B3 | 41.67,5.05 42.05,4.67 C43.2 42.05,4.55 42.18,4.42 42.18,3.91 | 42.18,3.91 42.18,3.53 C7.2 | 42.18,3.91 43.45,3.91 C47.2 | 37.1,10.9 37.35,10.9 IC3.8 | 37.1,10.9 36.97,10.9 IC3.9 37.1,10.9 | v37.1,11.4 37.1,10.9 | 16.65,26.9 19.32,26.9 C30.1 | 16.65,26.9 16.14,26.39 13.86,26.39 13.47,26.01 13.47,23.72 C19.1 13.6,23.6 13.6,23.34 14.11,22.83 14.11,20.93 13.6,20.42 C20.1 13.47,20.29 12.46,20.29 11.95,19.79 11.57,19.79 J3.8 11.44,19.79 11.19,19.79 8.9,22.07 8.9,23.98 J3.MP1 8.78,24.1 8.01,24.87 3.95,24.87 2.3,26.52 2.3,26.77 SJ2.1 | 3.19,5.56 4.59,5.56 C14.2 4.71,5.56 6.62,3.66 | 3.19,5.56 2.43,4.8 TP_VBAT_GND.TP | 3.19,5.56 1.92,6.83 1.92,8.23 D2.1 | 6.36,2.77 6.36,2.26 6.74,1.88 C2.2 | 6.36,2.77 6.36,3.15 C5.2 6.24,3.28 6.62,3.66 | 6.62,3.66 6.65,3.69 C4.1 11.01,4.99 11.82,4.42 12.52,3.72
  Top 0.127: 12.52,3.72 12.98,3.26 SW_UP.1 | 6.36,2.77 4.71,2.77 TP_GND.TP | R7.1 23.38,27.41 22.62,27.41 22.11,26.9 C49.1 | C49.1 21.98,26.9 21.98,27.02 20.84,28.17 20.21,28.17 19.82,28.55 19.82,28.93 J2.A12_B1 19.7,29.06 19.19,29.56 18.68,29.56 J2.SH4 | R14.1 13.47,34.01 13.22,34.01 12.46,33.25 11.95,33.25 11.82,33.38 11.82,33.88 12.08,34.14 R12.1 12.21,34.26 12.59,34.64 13.98,34.64 14.62,34.01 14.87,34.01 | 14.87,34.01 15.25,34.01 R8.2 15.38,34.01 15.38,34.14 15.63,34.39 17.92,34.39 18.55,33.76 J2.SH2 J2.SH1 | J3.17 11.44,15.21 11.19,15.21 8.9,12.93 8.9,11.02 J3.MP2 8.9,10.9 11.06,10.9 13.09,8.86 13.98,8.86 14.74,9.63 C28.1 14.74,9.75 15.63,9.75 C15.2 15.39,11.09 C1.2 | C23.1 C24.1 13.6,14.32 13.6,13.56 C25.1 13.6,13.44 13.6,12.55 C26.1 13.6,12.42 13.73,12.42 14.49,11.66 | 14.49,11.66 14.62,11.79 C22.1 | 14.49,11.66 13.6,10.77 C27.1 | C1.2 15.63,11.66 14.74,11.66 C22.1 | 14.49,11.66 C22.1 | v22.36,14.07 22.62,14.32 23,14.32 C46.2 | 25.54,20.29 25.79,20.04 26.43,20.04 U2.P$F23 | 21.98,20.42 22.24,20.68 22.24,21.18 U2.P$B7 22.24,21.31 22.11,21.44 22.11,22.2 22.62,22.71 22.62,26.01 22.11,26.52 22.11,26.77 C49.1 | 21.98,19.02 21.98,18.01 U2.P$83 | 21.98,19.02 U2.P$79 | 21.98,19.02 U2.P$74 | 21.98,20.42 U2.P$75 | 21.98,20.42 U2.P$74 | U2.P$74 23.13,18.64 23.13,18.01 U2.P$84 23.13,17.88 23.13,16.74 U2.P$88 | U2.P$80 23.13,19.15 U2.P$74 | U2.P$76 23,20.29 22.49,19.79 U2.P$74 | 25.41,16.74 24.4,16.74 U2.P$89 | U2.P$85 24.27,17.88 U2.P$74 | U2.P$81 24.4,19.15 U2.P$74 | U2.P$77 24.4,20.29 24.91,19.79 25.03,19.79 U2.P$74 | 25.41,16.74 U2.P$90 | 25.41,16.74 U2.P$74 | U2.P$86 25.41,17.88 24.91,17.37 24.78,17.37 U2.P$74
  Top 0.127: U2.P$82 25.41,19.15 24.91,19.66 U2.P$74 | v16.4,11.66 15.76,11.66 C1.2 | v12.52,6.15 12.52,3.72 | 16.65,26.9 16.65,27.79 15.63,28.8 15.13,28.8 14.87,29.06 14.87,34.01 | 25.54,20.29 U2.P$78 | 25.54,20.29 U2.P$74 | U1.9 36.34,6.2 U1.1
  GND 0.127: IC4.B3 41.48,6.54 IC4.B1 | v37.09,6.95 36.63,6.49 v36.39,6.49 | U1.6 34.32,7.24 v34.32,7.45
  Bottom 0.127: U2.P$78 25.54,20.42 25.67,20.55 30.37,20.55 31.51,19.41 31.51,19.28 37.1,13.69 v37.1,11.4 37.1,10.64 v35.57,9.12 34.32,7.87 v34.32,7.45 | J2.SH4 18.68,29.69 18.68,33.63 J2.SH2 | 22.27,16.33 22.27,14.17 v22.36,14.07 | 22.27,16.33 21.98,16.61 U2.P$87 21.86,16.61 18.81,16.61 17.79,15.6 17.79,14.2 16.4,12.8 v16.4,11.66 12.52,7.79 v12.52,6.15 | 22.27,16.33 22.36,16.23 22.75,16.61 23,16.61 U2.P$88
  Power 0.127: IC4.B1 41.5,7.5
  other vias: 41.48,7.5 41.52,6.5 35.12,6.45 36.1,6.2
  pour Top (isolate 0.254): 6.4,34.6 41.3,34.6 44.8,31.1 44.8,4.6 45,4.4 42.9,2.3 3.8,2.3 0.6,5.5 0.6,10 7.6,10 7.6,24.7 7.4,24.9 0.6,24.9 0.5,24.8 0.5,29.1 6.1,34.7
  pour Bottom (isolate 0.254): 7.3,34.6 40.8,34.6 40.9,34.7 44.3,31.3 44.8,31.3 44.8,4.4 42.7,2.3 4.1,2.3 0.8,5.6 0.8,10.2 7.9,10.2 7.9,24.3 7.3,24.9 0.7,24.9 0.7,28
  pour GND (isolate 0.254): 6.2,34.8 6.7,34.3 41.4,34.3 44.7,31 44.8,31 44.8,4.2 42.9,2.3 7,2.3 5.3,0.6 0.8,5.1 0.8,10 0.7,10.1 7.5,10.1 7.8,10.4 7.8,24.4 7.3,24.9 0.5,24.9 0.5,29.1
HAPTIC_EN  (via drill 0.3)
  Top 0.127: v18.68,18.26 19.7,17.25 U2.P$U1 | v42.55,8.3 42.55,8.09 IC4.A1
  Bottom 0.127: v18.68,18.26 18.68,19.91 18.94,20.17 18.94,20.93 18.68,21.18 18.68,21.56 19.7,22.58 21.73,22.58 22.49,23.34 28.71,23.34 35.06,16.99 35.06,16.86 40.53,11.4 40.53,7.97 40.91,7.59 41.84,7.59 v42.55,8.3
IMU_INT1  (via drill 0.3)
  Top 0.127: v19.95,18.26 20.46,18.26 U2.P$N1 | v37.35,10.26 37.86,9.75 IC3.5
  Bottom 0.127: v19.95,18.26 19.95,18.77 19.44,19.28 19.44,19.53 22.75,22.83 24.4,22.83 26.43,20.8 30.49,20.8 34.56,16.74 34.56,16.61 37.61,13.56 37.61,11.02 37.35,10.76 v37.35,10.26
IMU_INT2  (via drill 0.2 pad 0.16, 0.35 pad 0.5)
  GND 0.127: IC3.6 37.98,11.75 31.73,18 U2.P$P2
  other vias: 37.98,10.35 20.95,18
LX1
  Top 0.127: IC2.B2 26.68,7.47 27.06,7.47 IC2.B3 27.19,7.34 28.33,7.34 30.49,9.5 L1.1
LX2
  Top 0.127: IC2.D2 26.68,6.58 27.06,6.58 IC2.D3 27.19,6.58 29.6,6.58 30.49,7.47 L1.2
MOSI  (via drill 0.2 pad 0.16)
  GND 0.127: J3.14 11.82,17.05 15.75,17.05 15.75,21.55 17.8,23.6 23.6,23.6 23.6,21.35 U2.P$B13
  other vias: 11.53,16.75 23.7,21.25
N$1
  Top 0.127: IC1.D1 21.35,8.86 22.11,8.86 23.89,7.09 23.89,5.06 R1.2
N$5
  Top 0.127: IC2.D1 26.3,6.58 26.18,6.58 25.92,6.32 25.92,3.66 26.43,3.15 R2.1
N$8
  Top 0.127: IC2.E1 26.3,6.07 26.46,5.92 31.74,5.92 33.08,7.26 38.98,7.26 R3.1
N$20
  Top 0.127: R6.1 34.05,8.61 35.7,8.61 36.34,9.24 IC3.1
N$27
  Top 0.127: IC4.A2 42.16,7.21 42.56,7.21 44.59,9.24 44.84,9.24 C11.1
N$31
  Top 0.127: R7.2 23.51,27.02 23.64,27.02 24.02,27.41 24.02,28.3 24.14,28.42 24.14,28.93 J2.A5
N$37
  Top 0.127: C17.1 15.63,14.32 16.78,14.32 18.3,12.8 18.3,12.29 16.14,10.13 16.14,9.17 14.04,7.07 7.97,7.07 D3.1 7.63,7.34 6.74,8.23 5.47,8.23 D2.2
N$38
  Top 0.127: R8.1 15.89,33.88 17.03,33.88 19.95,30.96 21.09,30.96 21.48,30.58 21.48,29.82 21.35,29.69 21.35,29.06 J2.B5
N$40  (via drill 0.3)
  Top 0.127: C17.2 15.51,15.47 14.74,16.23 14.49,16.23 L2.2 14.36,16.36 14.36,16.61 v13.98,16.99 | Q1.3 8.78,31.98 8.14,31.98 6.36,30.2 D4.2 6.36,30.07 7.51,28.93 v7.51,28.17
  Bottom 0.127: v13.98,16.99 7.51,23.47 v7.51,28.17
N$48
  Top 0.127: SJ2.2 3.82,26.9 6.87,26.9 8.65,28.68 8.65,29.44 R13.1 8.65,29.56 8.65,30.2 10.43,31.98 11.57,31.98 13.09,33.5 13.47,33.5 R14.2
N$50
  Top 0.127: C19.2 13.47,22.45 12.59,22.45 11.95,21.82 11.57,21.82 J3.4
N$51
  Top 0.127: C20.2 13.47,21.44 12.08,21.44 11.95,21.31 11.57,21.31 J3.5
N$54
  Top 0.127: C23.2 13.35,15.34 12.46,15.34 11.95,14.83 11.57,14.83 J3.18
N$55  (via drill 0.2 pad 0.16)
  GND 0.127: J3.19 12.25,14.25 12.5,14.5 14.55,14.5 C24.2
  other vias: 11.53,14.25 14.65,14.4
N$56  (via drill 0.3)
  Top 0.127: v15.38,13.56 14.74,13.56 C25.2 | v12.84,13.82 11.57,13.82 J3.20
  Bottom 0.127: v15.38,13.56 13.09,13.56 v12.84,13.82
N$57  (via drill 0.3)
  Top 0.127: v16.27,13.31 17.41,13.31 18.05,12.67 18.05,12.42 17.67,12.04 17.41,12.04 17.29,12.17 15.38,12.17 15.13,12.42 14.74,12.42 C26.2 | v12.33,13.05 12.08,13.05 11.95,13.18 11.57,13.18 J3.21
  Bottom 0.127: v16.27,13.31 15.76,13.31 15.51,13.05 v12.33,13.05
N$58
  Top 0.127: C22.2 13.47,11.79 12.84,11.79 11.95,12.67 11.57,12.67 J3.22
N$59
  Top 0.127: C27.2 14.62,10.64 14.11,10.13 14.11,9.37 13.86,9.12 13.22,9.12 10.94,11.4 10.94,12.04 11.06,12.17 11.44,12.17 J3.23
N$60
  Top 0.127: C28.2 13.47,9.75 11.57,11.66 J3.24
N$63
  Top 0.127: U2.P$C1 20.46,20.8 17.54,20.8 13.73,24.61 13.73,25.88 13.98,26.14 19.44,26.14 19.95,26.64 19.95,26.9 C30.2
N$64  (via drill 0.3)
  Top 0.127: v20.97,21.82 21.22,21.56 21.22,21.31 U2.P$B3 | v19.95,21.82 18.55,21.82 15.13,25.25 L3.1
  Bottom 0.127: v19.95,21.82 v20.97,21.82
N$65
  Top 0.127: L4.1 13.73,30.2 13.73,28.68 15,27.41 L3.2
N$66  (via drill 0.3)
  Top 0.127: C31.1 32.65,28.68 32.78,28.55 C32.1 32.78,27.28 31.26,27.28 C38.1 31.13,27.15 31.13,26.9 30.75,26.52 | v27.83,20.04 27.57,20.29 26.94,20.29 U2.P$E24 | v27.83,21.44 27.83,23.6 30.75,26.52 | 20.46,26.64 20.46,27.15 19.32,28.3 17.67,28.3 15.76,30.2 L4.2 | 20.46,26.64 20.46,23.85 21.73,22.58 21.73,21.31 U2.P$B5 | v30.75,26.64 30.75,26.52 | 20.46,26.64 v20.84,26.64
  Bottom 0.127: v20.84,26.64 v30.75,26.64
  Power 0.127: v27.83,21.44 v27.83,20.04
N$71
  Top 0.127: U2.P$A18 24.91,21.82 24.91,23.47 25.41,23.98 C33.1
N$73
  Top 0.127: U2.P$B24 26.94,21.31 26.94,23.85 27.83,24.74 27.83,26.14 28.46,26.77 X1.1 28.59,26.77 29.6,26.77 C36.1
N$74
  Top 0.127: U2.P$A23 26.43,21.82 26.43,23.72 27.06,24.36 27.06,25.5 X1.3 27.06,25.63 26.81,25.88 25.92,25.88 C35.1
N$75
  Top 0.127: U2.P$D23 26.43,20.55 26.81,20.55 26.94,20.68 30.49,20.68 34.18,24.36 34.3,24.36 34.43,24.48 34.43,25.63 34.68,25.88 C37.1
N$77  (via drill 0.3)
  Top 0.127: v26.94,19.79 26.68,19.53 26.43,19.53 U2.P$H23 | v27.19,27.66 29.48,29.95 29.48,31.98 L5.1 29.48,32.11 29.48,34.14 C39.1
  Power 0.127: v26.94,19.79 26.94,27.41 v27.19,27.66
N$78
  Top 0.127: L5.2 32.02,32.49 32.02,34.26 C40.1 32.14,34.26 34.68,34.26 34.81,34.14 36.59,34.14 | 36.59,34.14 36.97,34.52 37.61,34.52 39.89,32.23 41.54,32.23 ANT1.1 | 36.59,34.14 C41.1
N$80
  Top 0.127: U2.P$N24 26.94,18.26 28.84,18.26 34.3,23.72 C42.1
N$94  (via drill 0.3)
  Top 0.127: v20.59,15.72 20.71,15.6 20.97,15.6 21.09,15.72 21.6,15.72 U2.P$AC5 | v22.36,13.18 23,13.18 C46.1
  Bottom 0.127: v20.59,15.72 20.59,14.96 v22.36,13.18
N$103  (via drill 0.3)
  Top 0.127: v20.21,23.34 20.46,23.09 20.46,21.69 20.84,21.31 20.84,21.18 20.97,21.06 20.97,20.55 U2.P$D2 | v23.13,24.23 23.51,24.23 24.27,24.99 X2.2 24.27,25.12 24.27,27.79 24.52,28.04 24.91,28.04 25.29,27.66 25.29,27.53 C48.2
  Bottom 0.127: v20.21,23.34 21.09,24.23 v23.13,24.23
N$104  (via drill 0.3)
  Top 0.127: v18.43,20.29 20.33,20.29 20.59,20.04 20.97,20.04 U2.P$F2 | v21.22,23.72 21.22,24.48 21.73,24.99 X2.1 21.73,25.12 21.6,25.25 21.6,26.77 C49.2
  Bottom 0.127: v18.43,20.29 18.43,21.69 19.57,22.83 20.33,22.83 v21.22,23.72
OUT+
  Top 0.127: IC4.A3 42.14,6.71 43.7,6.71 44.59,7.59 TP_OUT+.TP
OUT-
  Top 0.127: IC4.C3 40.35,6.51 TP_OUT-.TP
P0.13  (via drill 0.3)
  Top 0.127: C14.1 4.59,4.55 3.32,3.28 3.32,2.26 4.33,1.24 8.52,1.24 9.66,2.39 10.25,2.39 SW_UP.2 11.4,4.29 v11.67,4.56 | v18.3,14.2 18.55,13.94 21.09,13.94 22.36,15.21 U2.P$AD8 | v17.79,7.59 17.79,6.42 R9.1
  Bottom 0.127: v18.3,14.2 18.3,13.94 17.03,12.67 17.03,8.61 | 17.03,8.61 17.03,8.36 v17.79,7.59 | v11.67,4.56 15.72,8.61 17.03,8.61
P0.14  (via drill 0.2 pad 0.16, 0.3)
  Top 0.127: SW_ENT.2 20.14,3.92 17.79,2.89 17.16,3.53 17.16,3.66 R10.1 17.03,3.78 16.65,4.16 v16.65,6.83 | v16.65,8.1 16.45,8.3 16.45,9.2 16.75,9.5 C15.1
  GND 0.127: U2.P$AC9 22.7,15.25 21.7,14.25 21.7,9.55 24.3,6.95 24.3,5.35 19.27,5.35 16.65,7.97 v16.65,8.1
  Bottom 0.127: v16.65,6.83 v16.65,8.1
  other vias: 22.7,15.75
P1.01
  Top 0.127: 31.89,15.34 26.94,15.34 26.43,15.85 26.43,16.48 U2.P$Y23 | 31.89,15.34 32.02,15.47 Q2.1 31.89,15.34 | 31.89,15.34 31.89,14.58 32.52,13.94 32.65,13.94 R15.1
P1.02  (via drill 0.3)
  Top 0.127: 28.46,17.37 32.14,21.06 35.19,21.06 35.32,21.18 35.32,22.2 34.81,22.71 C16.1 | 28.46,17.37 27.83,16.74 26.94,16.74 U2.P$W24 | v33.03,12.93 33.54,12.93 R11.1 | v29.22,16.74 28.59,17.37 28.46,17.37 | SW_DN.2 31.43,2.8 v31.15,2.8
  Bottom 0.127: v29.22,16.74 v33.03,12.93
  Power 0.127: v31.15,2.8 31.15,3.51 33.03,5.39 v33.03,12.93
PMIC_INT  (via drill 0.2 pad 0.16)
  GND 0.127: IC1.A1 21.3,16.4 20.8,16.9 20.95,17.05 U2.P$T2
  other vias: 21.3,7.7 20.95,17.5
RESE  (via drill 0.3)
  Top 0.127: Q1.2 10.94,32.87 8.14,30.07 8.14,29.56 R13.2 8.14,29.44 v8.14,28.8 | v10.43,22.96 11.06,22.33 11.44,22.33 J3.3
  GND 0.127: v10.43,22.96 8.14,25.25 v8.14,28.8
RESET  (via drill 0.2 pad 0.16, 0.3, 0.35)
  Top 0.127: v31,19.28 32.52,20.8 35.32,20.8 35.57,21.06 35.57,21.56 37.35,23.34 38.49,23.34 39.38,22.45 39.76,22.45 J1.6 | v24.41,11.86 TP_RESET.TP
  GND 0.127: U2.P$AC13 24.41,15.04 v24.41,11.86
  Bottom 0.127: v31,19.28 28.46,19.28 26.18,16.99 26.18,13.63 v24.41,11.86
  other vias: 23.7,15.75
SCK  (via drill 0.3)
  Top 0.127: v22.87,22.33 23.38,21.82 U2.P$A12 | v19.95,19.41 15.13,19.41 13.09,17.37 11.57,17.37 J3.13
  Bottom 0.127: v19.95,19.41 v22.87,22.33
SCL  (via drill 0.2 pad 0.16, 0.3, 0.35)
  Top 0.127: v41.03,8.3 41.03,7.49 IC4.C1 | v41.67,12.42 42.81,13.56 R4.2 | v23,6.96 21.86,8.1 21.35,8.1 IC1.B1 | v24.91,6.15 24.91,4.04 25.79,3.15 R2.2 25.79,3.02 26.18,2.64 26.56,2.64 26.81,2.89 26.81,3.15 29.23,5.57 32.13,5.57 v32.23,5.47 | v35.83,10.01 35.95,9.88 36.34,9.88 IC3.12
  GND 0.127: U2.P$M2 20.4,17.95 20.4,6.26 22.3,6.26 v23,6.96 | U1.7 34.64,5.47 v32.23,5.47
  Bottom 0.127: v41.03,8.3 41.03,11.79 v41.67,12.42 | v23,6.96 24.1,6.96 v24.91,6.15 32.78,6.15 32.78,6.96 v35.83,10.01
  Power 0.127: v41.03,8.3 38.17,8.3 36.46,10.01 v35.83,10.01
  other vias: 20.95,18.5 35.12,5.95
SDA  (via drill 0.2 pad 0.16, 0.3, 0.35)
  Top 0.127: v23.38,5.94 23.51,6.07 23.51,7.09 22.11,8.48 21.35,8.48 IC1.C1 | v29.79,4.56 28.86,4.56 v28.46,4.16 | v18.81,15.98 18.17,16.61 18.17,18.39 18.55,18.77 20.46,18.77 U2.P$L1 | R3.2 38.8,6.72 v37.9,7.62 | v36.84,8.74 36.84,9.24 IC3.2 | R5.2 43.3,11.09 v43.21,11
  GND 0.127: IC4.B2 42.1,7 43.21,8.11 v43.21,11 | v29.79,4.56 30.67,5.45 U1.8
  Bottom 0.127: v18.81,15.98 25.67,9.12 25.67,7.85 25.29,7.47 22.87,7.47 22.49,7.09 22.49,6.83 v23.38,5.94 25.16,4.16 v28.46,4.16 32.27,4.16 35.93,7.82 37.7,7.82 v37.9,7.62 36.84,8.68 v36.84,8.74 37.04,8.74 41.39,4.39 43.21,6.2 v43.21,11
  other vias: 41.5,7 35.12,5.45
SWCLK
  Top 0.127: U2.P$AA24 26.94,16.23 31,16.23 34.18,19.41 TP_SWCLK.TP 34.3,19.53 34.94,20.17 38.49,20.17 39.38,21.06 39.76,21.06 J1.4
SWDIO
  Top 0.127: U2.P$AC24 26.94,15.85 31.38,15.85 31.89,16.36 33.67,16.36 35.7,14.32 37.48,14.32 TP_SWDIO.TP 37.61,14.32 39.51,16.23 39.51,18.64 39.76,18.9 39.76,19.79 J1.2
SWO
  Top 0.127: U2.P$AD22 26.05,15.21 26.05,11.79 26.81,11.02 TP_SWO.TP
VBAT  (via drill 0.2 pad 0.16, 0.3, 0.35, 0.35 pad 0.16)
  Top 0.127: IC1.C2 20.84,8.48 20.21,8.48 19.19,7.47 19.19,7.21 19.52,6.88 18.8,6.43 18.8,5.2 TP_VBAT.TP 19.12,4.88 v20.65,4.88 | 27.95,1.88 27.95,1.37 C9.1 | 27.95,1.88 31.09,5.01 37.62,5.01 39.45,3.18 39.95,3.18 v40.25,3.48 | 27.95,1.88 v27.19,2.64
  GND 0.127: v40.25,3.48 40.25,4.18 38.19,6.25 37.28,6.25 v37.09,6.45 v37.09,5.95
  Bottom 0.127: v20.65,4.88 24.95,4.88 v27.19,2.64
VBUS  (via drill 0.3)
  Top 0.127: v19.7,7.34 20.46,7.34 20.84,7.72 IC1.A2 | v17.54,12.55 15.89,12.55 15.76,12.67 C1.1 | v19.19,14.96 19.44,15.21 20.97,15.21 U2.P$AD2 | 34.3,32.11 37.1,32.11 | 37.1,32.11 37.73,32.11 C13.2 | 34.3,32.11 34.3,33.38 C12.2 | 34.3,32.11 C45.1 34.18,31.98 33.67,31.47 v33.67,31.34 | 37.1,32.11 37.1,30.33 36.59,29.82 36.34,29.82 D1.5 | v20.97,30.45 20.97,30.2 20.71,29.95 20.71,29.06 J2.A9_B4 | v24.02,30.96 25.29,29.69 25.29,29.06 J2.A4_B9
  Bottom 0.127: v19.7,7.34 19.7,10.39 v17.54,12.55 19.19,14.2 v19.19,14.96 | v20.97,30.45 23.51,30.45 v24.02,30.96 24.4,31.34 v33.67,31.34
  Power 0.127: v19.19,14.96 19.95,15.72 19.95,17.37 21.22,18.64 21.22,21.18 21.86,21.82 21.86,29.56 v20.97,30.45
VREG  (via drill 0.3)
  Top 0.127: C5.1 7,3.15 7,2.64 7.76,1.88 C2.1 7.89,1.88 | v8.62,4.05 8.62,2.26 8.24,1.88 7.89,1.88 | 7.89,1.88 C4.2 | v20.33,7.97 20.46,8.1 20.84,8.1 IC1.B2 | v25.16,7.97 26.18,7.97 26.3,7.85 | 26.3,7.85 26.68,7.85 | 26.3,7.85 IC2.A1 | 26.68,7.85 27.06,7.85 IC2.A3 | 26.68,7.85 IC2.A2 | v18.43,2.39 17.54,1.5 TP_VREG.TP
  Bottom 0.127: v25.16,7.97 v20.33,7.97 20.33,7.34 18.43,5.44 18.43,4.05 | 18.43,4.05 v18.43,2.39 | 18.43,4.05 v8.62,4.05